# Altium PCB 16CH.PcbDoc (part 2 of 2)
Units mm, origin at the board's own origin, x right, y up, seen from the top; angles counter-clockwise.
Board outline 152.4 x 101.6 mm, 2 copper layers (F.Cu, B.Cu); 147 components, 0 nets, 455 pads, 153 vias.
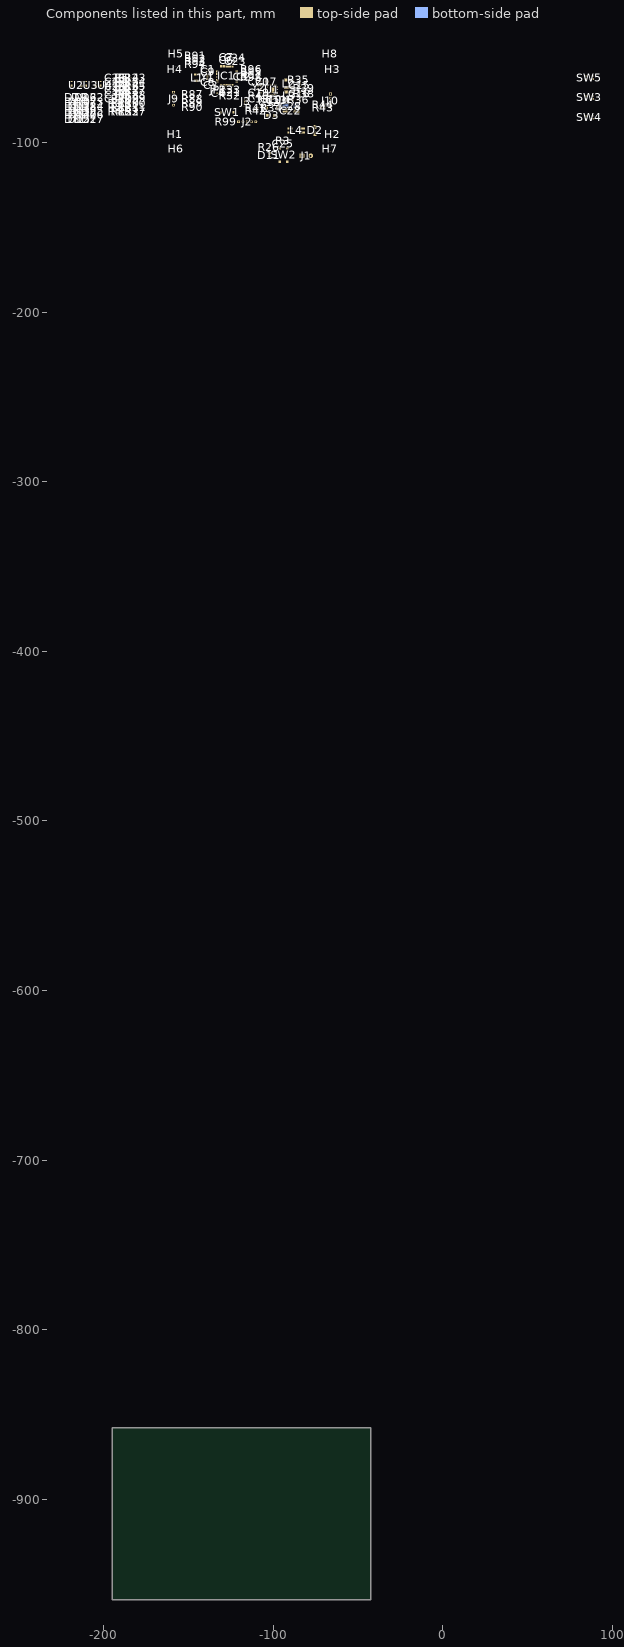
[diagram p2: the components of this part, seen from the top]

## Part data
C1 C2 C3 C4 C5 C6 C7 C10 C11 C12 C13 C14 C17 C18 C21 C23 C24 C25: library part C_0603_1608Metric, "Capacitor SMD 0603 (1608 Metric), square (rectangular) end terminal, IPC-7351 nominal, (Body size source: IPC-SM-782 page 76, https://www.pcb-3d.com/wordpress/wp-content/uploads/ipc-sm-782a_amendment_1_and_2.pdf), generated with kicad-footprint-generator", Package=C_0603, ki_fp_filters=C_*
  C1: Description="CAP CER 4.7uF 6.3V X7R 0603", MP=CL10B475KQ8NQNC, MF="Samsung Electro-Mechanics", OZD=C1608X7S1A475K080AC
  C2 C14: Description="CAP CER 1uF 10V X7R 0603", MP=CL10B105KP8NNNC, MF="Samsung Electro-Mechanics", OZD=CL10B105KP8NNNC
  C3 C4 C5 C6 C21: Description="CAP CER 100nF 50V X7R 0603", MP=CC0603KRX7R9BB104, MF=YAGEO
  C7: Description="CAP CER 2.2uF 10V X7R 0603", MP=CL10B225KP8NNNC, MF="Samsung Electro-Mechanics", OZD=CL10B225KP8NNNC
  C10: Description="MLCC (1608) 0603 47nF 50VDC ±10% X7R", MP=CL10B473KB8NNNC, MF=SAMSUNG, OZD=CL10B473KB8NNNC
  C11: Description="CAP CER 220nF 50V X7R 0603", MP=CL10B224KB8NNNC, MF="Samsung Electro-Mechanics", OZD=CL10B224KB8NNNC
  C12 C13 C17 C18 C23 C24: Description="CAP CER 100nF 50V X7R 0603", MP=CL10B104KB8NNNC, MF="Samsung Electro-Mechanics"
  C25: Description="X7R 100nF 50V ±10% 0603 Multilayer Ceramic", MP=CC0603KRX7R9BB104, MF=YAGEO
C8 C9 C19 C20: library part C_0603_1608Metric, "Capacitor SMD 0603 (1608 Metric), square (rectangular) end terminal, IPC-7351 nominal, (Body size source: IPC-SM-782 page 76, https://www.pcb-3d.com/wordpress/wp-content/uploads/ipc-sm-782a_amendment_1_and_2.pdf), generated with kicad-footprint-generator", Package=C0603, MF="Samsung Electro-Mechanics", ki_fp_filters=C_*
  C8 C9: Datasheet=https://www.lcsc.com/datasheet/lcsc_datasheet_2304140030_YAGEO-CC0603JRNPO9BN200_C105621.pdf, Description="CAP CER 15pF 50V C0G 0603", MP=CL10C150JB8NNNC, OZD=CL10C150JB8NNNC
  C19 C20: Description="CAP CER 10pF 50V C0G 0603", MP=CL10C100JB8NNNC, OZD=CL10C100JB8NNNC
C15 C16: library part C_0805_2012Metric, "Capacitor SMD 0805 (2012 Metric), square (rectangular) end terminal, IPC-7351 nominal, (Body size source: IPC-SM-782 page 76, https://www.pcb-3d.com/wordpress/wp-content/uploads/ipc-sm-782a_amendment_1_and_2.pdf, https://docs.google.com/spreadsheets/d/1BsfQQcO9C6DZCsRaXUlFlo91Tg2WpOkGARC1WS5S8t0/edit?usp=sharing), generated with kicad-footprint-generator", Package=C_0805, Description="CAP CER 10uF 16V X7R 0805", MP=CL21B106KOQNNNE, MF="Samsung Electro-Mechanics", OZD=CL21B106KOQNNNE, ki_fp_filters=C_*
C22: library part CP_Elec_8x10, "SMD capacitor, aluminum electrolytic, Nichicon, 8.0x10mm", Package="Radial D8 L10", Description="CAP.EL.100uF 35V 8x10 105C 3000H AEC-Q200 SMT", MP=CD035M101F10PKKKV00A, MF=SUSCON, ki_fp_filters=C_*
C26 C27 C29 C30 C31 C32: library part C_0603_1608Metric, "Capacitor SMD 0603 (1608 Metric), square (rectangular) end terminal, IPC-7351 nominal, (Body size source: IPC-SM-782 page 76, https://www.pcb-3d.com/wordpress/wp-content/uploads/ipc-sm-782a_amendment_1_and_2.pdf)", Package=C_0603, Datasheet=~, Description="CAP CER 100nF 50V X7R 0603", KiLib_Generator=SMD_2terminal_chip_molded, MP=CC0603KRX7R9BB104, MF=YAGEO, ki_fp_filters=C_*
C28: library part CP_Elec_8x10, "SMD capacitor, aluminum electrolytic, Nichicon, 8.0x10mm", Description="capacitor, US symbol", OZD=EEEFK1C471P, ki_fp_filters=C_*
D1 D4 D5 D6 D7 D8 D9 D10 D12 D13 D14 D15 D16 D17 D18 D19 D20 D21 D22 D23 D24 D25 D26 D27: library part LED_0603_1608Metric, "LED SMD 0603 (1608 Metric), square (rectangular) end terminal, IPC-7351 nominal, (Body size source: http://www.tortai-tech.com/upload/download/2011102023233369053.pdf)", Package=L_0603, Description="LED SMD 0603 ORANGE 112mcd 130° WATER CLEAR", KiLib_Generator=SMD_2terminal_chip_molded, Sim.Pins="1=K 2=A", MF=LITEON, MP=LTST-C190KFKT-5A, ki_fp_filters="LED* LED_SMD:* LED_THT:*"
D2 D3: library part D_SMA, "Diode SMA (DO-214AC)", Package="DO214AC (SMA)", MF=HOTTECH
  D2: Description="DIODE TVS 400W 40V DO214AC SMA", MP=SMAJ40CA-HT, OZD=SMAJ40CA-HT, ki_fp_filters="TO-???* *_Diode_* *SingleDiode* D_*"
  D3: Datasheet=https://www.wontop.com/uploadfiles/56/sort_excel/pdf/ss22.pdf, Description="DIODE SCHOTTKY 1A 80V DO214AC (SMA)", MP=SS18-HT, OZD=SS18-HT, ki_fp_filters=D*SMA*
D11: library part LED_D3.0mm, "LED, diameter 3.0mm, 2 pins, generated by kicad-footprint-generator", Package="Through Hole,D=3mm", Description="20mA 2.5V Green 3mm Round Lens 60mW", MP=TZ-L2-03YYBYG1GDJ30-001, MF=TUOZHAN, OZD=FYL-5014UBC1C-1MA-TR13, ki_fp_filters="LED* LED_SMD:* LED_THT:*"
H1 H2 H3 H4 H5 H6 H7 H8: library part MountingHole_3mm, "Mounting Hole 3mm, no annular", Description="Mounting Hole without connection", ki_fp_filters=MountingHole*
IC1: library part LQFP-64_10x10mm_P0.5mm, "LQFP, 64 Pin (https://www.analog.com/media/en/technical-documentation/data-sheets/ad7606_7606-6_7606-4.pdf), generated with kicad-footprint-generator ipc_gullwing_generator.py", Package=LFQFP-64(10x10), Datasheet=https://www.renesas.com/us/ja/document/man/re01-group-products-256-kb-flash-memory-users-manual-hardware?language=ja&r=1321781, Description="ARM Cortex-M23 32 Bit 48MHz 53 LFQFP-64(10x10) Microcontrollers RoHS", MP=R7FA2L1AB3CFM, MF=RENESAS
J1: library part Samtec_HPM-02-01-x-S_Straight_1x02_Pitch5.08mm, "Through hole straight Samtec HPM power header series 11.94mm post length, 1x02, 5.08mm pitch, single row", Package="THT V/T", Description="CONNECTOR PC PIN CIRC .041DIA 12.56MM TIN", MP=L-KLS8-2170-13, MF="KLS ELECTRONIC", OZD=L-KLS8-2170-13, ki_fp_filters=TerminalBlock*:*
J2: library part PinHeader_1x05_P2.54mm_Vertical, "Through hole straight pin header, 1x05, 2.54mm pitch, single row", Description="Generic connector, single row, 01x05, script generated (kicad-library-utils/schlib/autogen/connector/)", ki_fp_filters=Connector*:*_1x??_*
J3: library part Tag-Connect_TC2030-IDC-NL_2x03_P1.27mm_Vertical, "Tag-Connect programming header; http://www.tag-connect.com/Materials/TC2030-IDC-NL.pdf", Datasheet=https://www.tag-connect.com/wp-content/uploads/bsk-pdf-manager/TC2030-CTX_1.pdf, Description="Tag-Connect ARM Cortex SWD JTAG connector, 6 pin, no legs", ki_fp_filters=*TC2030*
J9 J10: library part PinHeader_1x04_P2.54mm_Vertical, "Through hole straight pin header, 1x04, 2.54mm pitch, single row", Description="Generic connector, single row, 01x04, script generated (kicad-library-utils/schlib/autogen/connector/)", ki_fp_filters=Connector*:*_1x??_*
JP1: library part SolderJumper-2_P1.3mm_Open_TrianglePad1.0x1.5mm, "SMD Solder Jumper, 1x1.5mm Triangular Pads, 0.3mm gap, open", Description="Solder Jumper, 2-pole, open", ki_fp_filters=SolderJumper*Open*
L1: library part L_APV_ANR5012, "Inductor, APV, ANR5012, 5.0x5.0x1.2mm, (http://en.apvind.com/public/upload/20240407/3375c395e460caa8519b4d637d9113ce.pdf), generated with kicad-footprint-generator gen_inductor.py", Package="Non Standard", Description="INDUCTOR FIXED 0302 4.7uH SMD", OZD=PCD0302MT4R7, Field6=NRS5030T4R7MMGJV, MF=VIKING, MP=PCD0302MT4R7, ki_fp_filters="Choke_* *Coil* Inductor_* L_*"
L2 L3: library part L_APV_ANR6028, "Inductor, APV, ANR6028, 6.0x6.0x2.8mm, (http://en.apvind.com/public/upload/20240407/3375c395e460caa8519b4d637d9113ce.pdf), generated with kicad-footprint-generator gen_inductor.py", Package="Non Standard", Description="INDUCTOR POWER 220UH 6X6MM 500mA SMD", MP=NR6028-221M, MF="CORE MASTER", ki_fp_filters="Choke_* *Coil* Inductor_* L_*"
L4: library part L_CommonMode_50474C_7.5x5.9mm, "WE-CNSW SMT Common Mode Line Filter, https://www.we-online.com/components/products/datasheet/744232090.pdf", Package=SMD-4P,7x5.9mm, Datasheet=https://www.we-online.com/components/products/datasheet/744232090.pdf, Description="CMC 470uH 700mA 2LN SMD", MP=50474C, MF=muRata, OZD=50474C, ki_fp_filters=L*CommonMode*Wurth*WE*CNSW*1206*
R1 R2 R4 R5 R6 R7 R8 R9 R10 R11 R12 R13 R14 R15 R16 R17 R18 R19 R20 R21 R22 R23 R24 R25 R27 R28 R29 R30 R31 R37: library part R_0603_1608Metric, "Resistor SMD 0603 (1608 Metric), square (rectangular) end terminal, IPC-7351 nominal, (Body size source: IPC-SM-782 page 72, https://www.pcb-3d.com/wordpress/wp-content/uploads/ipc-sm-782a_amendment_1_and_2.pdf)", Package=R_0603, KiLib_Generator=SMD_2terminal_chip_molded, ki_fp_filters=R_*
  R1 R6 R7: Description="100mW Thick Film Resistors 75V Â±100ppm/â„ƒ Â±5% 10kÎ© 0603", MF=FOJAN, MP=FRC0603J103TS
  R2 R4 R5: Description="RES 330Ω ±5% 100mW 0603", MF=FOJAN, MP="FRC0603J331 TS"
  R8 R9 R10 R11 R12 R13 R14 R15 R16 R17 R18 R19 R20 R21 R22 R23 R24 R25 R27 R28 R29 R30 R31 R37: Description="RES 1kΩ ±5% 100mW 0603", MF=YAGEO, MP=RC0603JR-071KL
R3 R32 R33 R38 R39 R40 R41 R42 R43 R44 R87 R88 R89 R90 R91 R92 R93 R94 R95 R96 R97 R98 R99: library part R_0603_1608Metric, "Resistor SMD 0603 (1608 Metric), square (rectangular) end terminal, IPC-7351 nominal, (Body size source: IPC-SM-782 page 72, https://www.pcb-3d.com/wordpress/wp-content/uploads/ipc-sm-782a_amendment_1_and_2.pdf), generated with kicad-footprint-generator", Package=R_0603, ki_fp_filters=R_*
  R3 R32 R33: Description="RES 10kΩ ±5% 100mW 0603", MP=FRC0603J103TS, MF=FOJAN
  R38: Description="RES.(1608) 0603 91K Ohms 1% 1/10W-S 100PPM", MP=0603SAF9102T5E, MF=ROYALOHM, OZD=0603SAF9102T5E
  R39: Description="RES.(1608) 0603 10K Ohms 1% 1/4W AUTOMOTIV", MP=PS03W4F1002T5E, MF=ROYALOHM, OZD=PS03W4F1002T5E
  R40: Description="RES.(1608) 0603 20K Ohms 1% 1/10W-S 100PPM", MP=0603SAF2002T5E, MF=ROYALOHM, OZD=0603SAF2002T5E
  R41: Description="RES 220kΩ ±1% 100mW 0603", MP=ERJ3EKF2203V, MF=PANASONIC
  R42 R44: Description="RES 27kΩ ±1% 100mW 0603", MP=ERJ3EKF2702V, MF=PANASONIC
  R43: Description="RES 100kΩ ±1% 100mW 0603", MP=RC0603FR-07100KL, MF=YAGEO
  R91 R92 R93 R94: Description="RES 33Ω ±5% 100mW 0603", MP=RC0603JR-0733RL, MF=YAGEO
  R95 R96 R97 R98: Description="RES.(1608) 0603 33 Ohms 1% 1/10W-S 200PPM", MP=0603SAF330JT5E, MF=ROYALOHM, OZD=0603SAF330JT5E
  R99: Description="RES 330Ω ±5% 100mW 0603", MP="FRC0603J331 TS", MF=FOJAN
R26: library part R_0603_1608Metric, "Resistor SMD 0603 (1608 Metric), square (rectangular) end terminal, IPC-7351 nominal, (Body size source: IPC-SM-782 page 72, https://www.pcb-3d.com/wordpress/wp-content/uploads/ipc-sm-782a_amendment_1_and_2.pdf), generated with kicad-footprint-generator", Package=R0603, Description="RES 1kΩ ±5% 100mW 0603", MP=SCR0603J1K, MF=VO, ki_fp_filters=R_*
R34: library part R_2512_6332Metric, "Resistor SMD 2512 (6332 Metric), square (rectangular) end terminal, IPC-7351 nominal, (Body size source: IPC-SM-782 page 72, https://www.pcb-3d.com/wordpress/wp-content/uploads/ipc-sm-782a_amendment_1_and_2.pdf), generated with kicad-footprint-generator", Package=R_2512, Description="RES.(6432) 2512 27 Ohms 1% 2W", MP=HP122WF270JT4E, MF=ROYALOHM, OZD=HP122WF270JT4E, ki_fp_filters=R_*
R35 R36: library part R_0805_2012Metric, "Resistor SMD 0805 (2012 Metric), square (rectangular) end terminal, IPC-7351 nominal, (Body size source: IPC-SM-782 page 72, https://www.pcb-3d.com/wordpress/wp-content/uploads/ipc-sm-782a_amendment_1_and_2.pdf), generated with kicad-footprint-generator", Package=R_0805, Description="RES.(2012) 0805 1 Ohms 1%", MP=ERJ6RQF1R0V, MF=PANASONIC, OZD=ERJ6RQF1R0V, ki_fp_filters=R_*
REF**: library part LayerMarker_4_6.35x2.54mm_TextH1mm_P1.27mm_Named_BottomMirrored, "Layer marker, 4 layers, layer names, text size 1mm, pitch 1.27mm, margin 1.27mm"
SW1: library part SW_SPST_CK_RS282G05A3, "https://www.mouser.com/ds/2/60/RS-282G05A-SM_RT-1159762.pdf"
SW2: library part SW_SPST_Omron_B3FS-100xP, "Surface Mount Tactile Switch for High-Density Mounting, 3.1mm height, https://omronfs.omron.com/en_US/ecb/products/pdf/en-b3fs.pdf", Package=SMD,12x12mm, Description="Height 8mm SMD,12x12mm Tactile Switches RoHS", MP=KH-12X12X8H-SMT, MF=kinghelm
SW3 SW4 SW5: library part L-KLS7-TS3402-2.5, "Tactile switch, 4.7 x 3.5 mm, short push travel, H2.5mm, https://industry.panasonic.com/ac/cdn/e/control/switch/light-touch/catalog/sw_lt_eng_4735s.pdf", Package="SMT V/T", Description="SWITCH TACT 3.00x4.00 2.50mm 160gF SMT V/T", MP=L-KLS7-TS3402-2.5-160-T, MF="KLS ELECTRONIC", ki_fp_filters=SW*MEC*5G*
U1: library part QFN40_485AU-01_ONS, Package=QFN-40-EP(6x6), Datasheet=NCN5130MNTWG, Description="3.13V~3.47V 4mA QFN-40-EP(6x6) Drivers, Receivers, Transceivers RoHS", MP=NCN5130MNTWG, MF=onsemi, ki_fp_filters="QFN40_485AU-01_ONS QFN40_485AU-01_ONS-M QFN40_485AU-01_ONS-L"
U2 U3 U4: library part TSSOP-16_4.4x5mm_P0.65mm, "TSSOP, 16 Pin (https://www.jedec.org/document_search?search_api_views_fulltext=MO-153)", Package=TSSOP-16, Datasheet=http://www.ti.com/lit/ds/symlink/sn74hc595.pdf, Description="8-bit serial-in, serial or parallel-out shift register with output latches; 3-state", KiLib_Generator=package/gullwing, MP=74HC595PW,118, MF=Nexperia, ki_fp_filters="DIP*W7.62mm* SOIC*3.9x9.9mm*P1.27mm* TSSOP*4.4x5mm*P0.65mm* SOIC*5.3x10.2mm*P1.27mm* SOIC*7.5x10.3mm*P1.27mm*"
Y1: library part Crystal_SMD_SeikoEpson_FA238-4Pin_3.2x2.5mm, "crystal Epson Toyocom FA-238 https://support.epson.biz/td/api/doc_check.php?dl=brief_fa-238v_en.pdf, 3.2x2.5mm^2 package", Package="4-SMD 3225", Description="CRYSTAL 20MHz 3.2X2.5 4PIN 10pF SMD RALTRON", MP=FL3P2X2P5SSC, MF=RALTRON, OLD_MP=RH100-20.000-22-TR, OZD=RH100-20.000-10-1010-TR, ki_fp_filters=Crystal*
Y2: library part Crystal_SMD_SeikoEpson_FA238V-4Pin_3.2x2.5mm, "crystal Epson Toyocom FA-238 series https://support.epson.biz/td/api/doc_check.php?dl=brief_fa-238v_en.pdf, 3.2x2.5mm^2 package", Package=4-SMD, Description="CRYSTAL 16MHz 10pF SMD", MP=RH100-16.000-10-1010-EXT, MF=RALTRON, OZD=RH100-16.000-10-1010-EXT, ki_fp_filters=Crystal*

## Via types
v1: diameter 0.6, hole 0.35, F.Cu to B.Cu, tented both sides, 121 vias
v2: diameter 0.5, hole 0.3, F.Cu to B.Cu, tented both sides, 28 vias
v3: diameter 0.8, hole 0.4, F.Cu to B.Cu, tented both sides, 3 vias
v4: diameter 0.8, hole 0.45, F.Cu to B.Cu, tented both sides, 1 vias

## Nets (pads, with @x,y where several pads share a name; then routed paths per layer and width w, separated by ;. In a path a pad name is that pad's centre, name@x,y a point inside that pad or via, vN(x,y) a via of type N, cw(c..) or ccw(c..) an arc to the next point about the centre after c; other vN are vias at no path point)
pads on no net: C1.1 C1.2 C2.1 C2.2 C3.1 C3.2 C4.1 C4.2 C5.1 C5.2 C6.1 C6.2 C7.1 C7.2 C8.1 C8.2 C9.1 C9.2 C10.1 C10.2 C11.1 C11.2 C12.1 C12.2 C13.1 C13.2 C14.1 C14.2 C15.1 C15.2 C16.1 C16.2 C17.1 C17.2 C18.1 C18.2 C19.1 C19.2 C20.1 C20.2 C21.1 C21.2 C22.1 C22.2 C23.1 C23.2 C24.1 C24.2 C25.1 C25.2 C26.1 C26.2 C27.1 C27.2 C28.1 C28.2 C29.1 C29.2 C30.1 C30.2 C31.1 C31.2 C32.1 C32.2 D1.1 D1.2 D2.1 D2.2 D3.1 D3.2 D4.1 D4.2 D5.1 D5.2 D6.1 D6.2 D7.1 D7.2 D8.1 D8.2 D9.1 D9.2 D10.1 D10.2 D11.1 D11.2 D12.1 D12.2 D13.1 D13.2 D14.1 D14.2 D15.1 D15.2 D16.1 D16.2 D17.1 D17.2 D18.1 D18.2 D19.1 D19.2 D20.1 D20.2 D21.1 D21.2 D22.1 D22.2 D23.1 D23.2 D24.1 D24.2 D25.1 D25.2 D26.1 D26.2 D27.1 D27.2 H1.Un1 H2.Un1 H3.Un1 H4.Un1 H5.Un1 H6.Un1 H7.Un1 H8.Un1 IC1.1 IC1.2 IC1.3 IC1.4 IC1.5 IC1.6 IC1.7 IC1.8 IC1.9 IC1.10 IC1.11 IC1.12 IC1.13 IC1.14 IC1.15 IC1.16 IC1.17 IC1.18 IC1.19 IC1.20 IC1.21 IC1.22 IC1.23 IC1.24 IC1.25 IC1.26 IC1.27 IC1.28 IC1.29 IC1.30 IC1.31 IC1.32 IC1.33 IC1.34 IC1.35 IC1.36 IC1.37 IC1.38 IC1.39 IC1.40 IC1.41 IC1.42 IC1.43 IC1.44 IC1.45 IC1.46 IC1.47 IC1.48 IC1.49 IC1.50 IC1.51 IC1.52 IC1.53 IC1.54 IC1.55 IC1.56 IC1.57 IC1.58 IC1.59 IC1.60 IC1.61 IC1.62 IC1.63 IC1.64 J1.1 J1.2 J2.1 J2.2 J2.3 J2.4 J2.5 J3.1 J3.2 J3.3 J3.4 J3.5 J3.6 J3.Un1 J3.Un2 J3.Un3 J9.1 J9.2 J9.3 J9.4 J10.1 J10.2 J10.3 J10.4 JP1.1 JP1.2 L1.1 L1.2 L2.1 L2.2 L3.1 L3.2 L4.1 L4.2 L4.3 L4.4 R1.1 R1.2 R2.1 R2.2 R3.1 R3.2 R4.1 R4.2 R5.1 R5.2 R6.1 R6.2 R7.1 R7.2 R8.1 R8.2 R9.1 R9.2 R10.1 R10.2 R11.1 R11.2 R12.1 R12.2 R13.1 R13.2 R14.1 R14.2 R15.1 R15.2 R16.1 R16.2 R17.1 R17.2 R18.1 R18.2 R19.1 R19.2 R20.1 R20.2 R21.1 R21.2 R22.1 R22.2 R23.1 R23.2 R24.1 R24.2 R25.1 R25.2 R26.1 R26.2 R27.1 R27.2 R28.1 R28.2 R29.1 R29.2 R30.1 R30.2 R31.1 R31.2 R32.1 R32.2 R33.1 R33.2 R34.1 R34.2 R35.1 R35.2 R36.1 R36.2 R37.1 R37.2 R38.1 R38.2 R39.1 R39.2 R40.1 R40.2 R41.1 R41.2 R42.1 R42.2 R43.1 R43.2 R44.1 R44.2 R87.1 R87.2 R88.1 R88.2 R89.1 R89.2 R90.1 R90.2 R91.1 R91.2 R92.1 R92.2 R93.1 R93.2 R94.1 R94.2 R95.1 R95.2 R96.1 R96.2 R97.1 R97.2 R98.1 R98.2 R99.1 R99.2 SW1.1 SW1.2 SW2.1 SW2.2 SW3.1 SW3.2 SW3.3 SW3.4 SW4.1 SW4.2 SW4.3 SW4.4 SW5.1 SW5.2 SW5.3 SW5.4 U1.1 U1.2 U1.3 U1.4 U1.5 U1.6 U1.7 U1.8 U1.9 U1.10 U1.11 U1.12 U1.13 U1.14 U1.15 U1.16 U1.17 U1.18 U1.19 U1.20 U1.21 U1.22 U1.23 U1.24 U1.25 U1.26 U1.27 U1.28 U1.29 U1.30 U1.31 U1.32 U1.33 U1.34 U1.35 U1.36 U1.37 U1.38 U1.39 U1.40 U1.41 U2.1 U2.2 U2.3 U2.4 U2.5 U2.6 U2.7 U2.8 U2.9 U2.10 U2.11 U2.12 U2.13 U2.14 U2.15 U2.16 U3.1 U3.2 U3.3 U3.4 U3.5 U3.6 U3.7 U3.8 U3.9 U3.10 U3.11 U3.12 U3.13 U3.14 U3.15 U3.16 U4.1 U4.2 U4.3 U4.4 U4.5 U4.6 U4.7 U4.8 U4.9 U4.10 U4.11 U4.12 U4.13 U4.14 U4.15 U4.16 Y1.1 Y1.2 Y1.3 Y1.4 Y2.1 Y2.2 Y2.3 Y2.4
copper on no net: | length 1749.5
  F.Cu w0.2: -126.238,-72.072 -126.238,-72.412 -123.068,-75.582 -116.873,-75.582 ; -123.468,-66.257 -123.468,-67.447 -123.203,-67.712 v2(-123.103,-67.712) ; -121.543,-64.332 -117.183,-64.332 -114.928,-66.587 ; -115.603,-75.582 -114.273,-75.582 ; -115.603,-74.312 -114.803,-73.512 -114.803,-66.712 -114.928,-66.587 ; -115.283,-87.712 -115.283,-81.192 -114.273,-80.182 -114.273,-75.582 ; v2(-113.603,-67.712) -113.503,-67.812 -113.503,-74.812 -114.273,-75.582 ; -112.743,-87.712 -112.743,-67.122 -113.303,-66.562 -114.903,-66.562 -114.928,-66.587 ; v1(-104.003,-73.212) -103.003,-73.212 -102.453,-72.662 -102.213,-72.422 -102.213,-71.867 -102.213,-70.722 v1(-101.553,-70.062) v1(-100.463,-68.972) -99.713,-69.722 v1(-99.303,-69.722) -97.567,-69.722 -95.493,-69.722 v1(-95.053,-70.162)
  F.Cu w0.25: v1(-162.003,-53.712) -146.428,-53.712 ; v1(-161.253,-52.762) -147.653,-52.762 -146.97,-52.078 -146.428,-52.078 ; v1(-160.453,-51.362) -160.403,-51.412 -147.903,-51.412 -146.936,-50.445 -146.428,-50.445 ; v1(-159.303,-50.412) -148.028,-50.412 -146.428,-48.812 ; v2(-155.103,-55.212) -154.997,-55.318 -136.103,-55.318 -134.089,-57.332 -132.893,-57.332 ; v2(-155.003,-56.112) -154.803,-55.912 -136.403,-55.912 -134.483,-57.832 -132.893,-57.832 ; v2(-154.003,-54.712) -135.803,-54.712 -133.683,-56.832 -132.893,-56.832 ; -151.478,-79.202 -151.468,-79.192 -148.228,-79.192 ; -151.478,-76.662 -151.468,-76.652 -148.228,-76.652 ; -151.478,-74.122 -151.468,-74.112 -148.228,-74.112 ; -151.478,-71.582 -151.468,-71.572 -148.228,-71.572 ; -146.578,-79.192 -146.578,-78.587 -145.503,-77.512 v2(-130.203,-77.512) ; -146.578,-76.652 -136.203,-76.652 -129.343,-76.652 v2(-129.303,-76.612) ; -146.578,-74.112 -146.553,-74.112 -145.203,-75.462 v2(-128.303,-75.462) ; -146.578,-71.572 -146.543,-71.572 -143.603,-74.512 -129.203,-74.512 -127.697,-73.006 -127.697,-67.303 -127.968,-67.032 -127.968,-66.257 ; -144.778,-53.712 -132.163,-53.712 -130.968,-54.907 ; -144.778,-52.062 -132.353,-52.062 -130.468,-53.947 -130.468,-54.907 ; -144.778,-50.445 -133.12,-50.445 -129.468,-54.097 -129.468,-54.907 ; -144.778,-48.812 -143.778,-49.812 -133.003,-49.812 -128.968,-53.847 -128.968,-54.907 ; -139.123,-60.192 -139.123,-59.967 -137.468,-58.312 -137.303,-58.312 -134.783,-60.832 -132.893,-60.832 ; -137.548,-64.402 -137.548,-62.482 -137.523,-62.457 -136.648,-62.457 -135.523,-61.332 -132.893,-61.332 ; -132.893,-58.332 -131.623,-58.332 v2(-131.603,-58.312) ; v2(-131.603,-87.762) -131.553,-87.712 -128.528,-87.712 ; v2(-130.703,-101.862) -130.678,-101.887 -102.203,-101.887 ; v2(-130.003,-56.112) -130.003,-54.942 -129.968,-54.907 ; v2(-129.703,-70.012) -129.703,-68.512 -129.468,-68.277 -129.468,-66.257 ; v2(-129.003,-69.212) -129.003,-66.292 -128.968,-66.257 ; -128.468,-66.257 -128.468,-67.547 v2(-128.303,-67.712) ; -126.968,-66.257 -126.968,-69.622 -126.178,-70.412 -126.238,-70.472 -126.238,-72.072 -126.238,-74.877 -123.203,-77.912 v1(-123.203,-80.362) -123.203,-82.212 ; -126.878,-87.712 -123.478,-91.112 -106.803,-91.112 -99.003,-98.912 -94.803,-98.912 -94.803,-100.787 -94.778,-100.812 -96.103,-102.137 -96.103,-103.312 -96.103,-111.312 ; -126.468,-66.257 -126.468,-68.572 -126.228,-68.812 ; -121.543,-63.832 -115.083,-63.832 v2(-114.903,-64.012) ; -121.543,-63.332 -114.323,-63.332 -113.403,-62.412 -113.403,-61.612 ; -121.543,-59.332 -118.823,-59.332 -117.803,-58.312 -113.403,-58.312 ; -121.543,-58.832 -119.323,-58.832 -117.203,-56.712 -113.403,-56.712 ; v2(-114.903,-60.112) -114.733,-59.942 -113.403,-59.942 ; -111.753,-61.612 -111.453,-61.612 -110.453,-60.612 -102.753,-60.612 -101.713,-61.652 -101.713,-66.076 ; -111.753,-59.942 -102.573,-59.942 -101.213,-61.302 -101.213,-66.076 ; -111.753,-58.312 v2(-105.303,-58.312) ; -111.753,-56.712 v2(-106.003,-56.712) ; -109.003,-66.162 -109.003,-65.927 -107.278,-64.202 -106.513,-64.202 -105.503,-65.212 -105.503,-67.562 -104.843,-68.222 -103.359,-68.222 ; -107.278,-74.162 -106.653,-74.162 v1(-106.053,-73.562) -103.713,-71.222 -103.359,-71.222 ; -107.228,-72.452 -106.143,-72.452 -103.913,-70.222 -103.359,-70.222 ; -107.103,-68.562 -107.103,-70.367 -107.278,-70.542 -106.633,-70.542 -104.813,-68.722 -103.359,-68.722 ; v2(-105.503,-70.612) -104.946,-70.612 -104.056,-69.722 -103.359,-69.722 ; v2(-105.003,-69.812) -104.413,-69.222 -103.359,-69.222 ; v1(-104.353,-65.412) -104.603,-65.662 -104.603,-66.362 ; v1(-104.353,-62.562) -104.353,-61.862 -104.003,-61.512 -103.103,-61.512 -102.213,-62.402 -102.213,-66.076 -102.213,-67.222 v1(-101.638,-67.797) ; -103.359,-66.722 -104.243,-66.722 -104.603,-66.362 ; -102.203,-106.142 -102.203,-103.537 ; -101.318,-76.322 -100.853,-75.857 -100.853,-73.612 -100.703,-73.462 -100.713,-73.452 -100.713,-71.867 ; -99.713,-71.867 -99.713,-73.402 -97.893,-75.222 -97.893,-75.547 ; -97.567,-71.222 -96.693,-71.222 v1(-96.103,-71.812) ; -97.567,-67.722 -99.213,-67.722 v1(-99.428,-67.937) v1(-100.463,-68.972) v1(-101.638,-67.797) ; -81.713,-70.437 v1(-81.713,-69.512) -81.713,-68.697 ; -104.603,-66.362 -104.603,-67.412 -104.293,-67.722 -103.359,-67.722 -101.713,-67.722 v1(-101.638,-67.797)
  F.Cu w0.3: -144.623,-63.572 -143.483,-64.712 v1(-141.653,-64.712) ; -144.623,-59.872 -141.863,-59.872 v1(-141.853,-59.862) ; -137.428,-56.812 -136.503,-56.812 v1(-135.653,-57.662) -134.483,-58.832 -132.893,-58.832 ; v1(-134.803,-59.712) -134.183,-60.332 -132.893,-60.332 -129.783,-60.332 v1(-129.503,-60.612) ; v1(-134.603,-65.012) -130.653,-65.012 -130.468,-65.197 -130.468,-66.257 ; v1(-133.253,-72.562) -132.813,-72.122 -132.813,-70.992 -132.728,-70.907 -132.728,-68.812 ; v1(-133.253,-66.262) -133.303,-66.212 -135.678,-66.212 -135.678,-62.987 -134.523,-61.832 -132.893,-61.832 ; v1(-133.253,-48.962) -133.003,-48.962 -128.468,-53.497 -128.468,-54.907 ; v4(-133.253,-46.512) -127.703,-46.512 -126.618,-47.597 -126.618,-49.792 -126.638,-49.812 -126.638,-51.492 -126.968,-51.822 -126.968,-54.907 ; -131.278,-68.812 -130.983,-68.517 -130.983,-68.492 -129.968,-67.477 -129.968,-66.257 ; -128.188,-51.492 -128.188,-52.077 ; -127.968,-56.347 -127.968,-54.907 -127.968,-52.297 -128.188,-52.077 ; -127.503,-56.212 -127.468,-56.177 -127.468,-54.907 -127.468,-52.797 -128.188,-52.077 ; v1(-124.953,-58.862) -122.983,-60.832 -121.543,-60.832 -119.458,-60.832 -118.963,-60.337 -117.153,-60.337 -117.123,-60.367 -117.123,-59.332 v1(-116.953,-59.162) ; -124.588,-72.412 -124.503,-72.412 -122.603,-74.312 -116.873,-74.312 -117.653,-73.532 -117.653,-69.612 -117.653,-69.162 ; -124.578,-68.812 -118.003,-68.812 -117.653,-69.162 ; -123.968,-54.907 -123.968,-50.722 -123.238,-49.992 -123.238,-48.947 -122.903,-48.612 -85.703,-48.612 -76.553,-57.762 v2(-76.553,-67.562) ; -123.468,-54.907 -123.468,-52.772 -122.878,-52.182 -122.878,-52.437 -121.803,-53.512 v2(-110.703,-53.512) ; -121.543,-61.332 -119.518,-61.332 -118.963,-61.887 -117.153,-61.887 -117.123,-61.917 -115.858,-61.917 v1(-115.803,-61.862) ; v1(-115.703,-66.962) -115.703,-67.212 -117.653,-69.162 ; -110.728,-81.312 -110.728,-79.612 -110.728,-78.037 v2(-110.703,-78.012) ; -109.078,-79.612 v2(-107.403,-79.612) ; -103.546,-79.412 -104.903,-79.412 -105.403,-78.912 -105.403,-76.312 -101.713,-72.622 -101.713,-71.867 ; v1(-103.153,-62.712) -103.008,-62.857 -103.008,-64.002 -103.008,-64.407 -102.713,-64.702 -102.713,-66.076 ; -101.628,-74.552 -101.628,-73.737 -101.213,-73.322 -101.213,-71.867 ; -100.713,-66.076 -100.713,-64.322 v1(-100.303,-63.912) ; -100.213,-71.867 -100.213,-74.417 -100.078,-74.552 -100.078,-75.937 -97.621,-78.394 -97.621,-79.192 -97.841,-79.412 ; -99.213,-71.867 -99.213,-73.102 -98.318,-73.997 -97.893,-73.997 ; -98.713,-71.867 -98.713,-72.502 -98.203,-73.012 -98.153,-73.062 v1(-97.053,-73.062) ; -98.213,-71.867 -97.047,-71.867 -95.883,-73.032 -95.883,-73.997 ; -97.567,-69.222 -94.843,-69.222 -93.893,-70.172 -90.643,-70.172 ; -97.567,-68.722 -96.013,-68.722 v1(-95.853,-68.562) ; -97.567,-68.222 -96.441,-68.222 -95.731,-67.512 -90.683,-67.512 ; -97.567,-67.222 -96.313,-67.222 -95.753,-66.662 -95.553,-66.462 v1(-94.853,-66.462) ; v1(-95.803,-81.262) -92.853,-81.262 -92.833,-81.242 ; -93.228,-100.812 -93.228,-101.687 -91.603,-103.312 -91.603,-111.312 ; -71.328,-77.712 -71.308,-77.732 -71.308,-79.522 -71.308,-81.007 v2(-71.303,-81.012) ; -69.658,-79.522 -66.696,-79.522 -66.196,-79.022
  F.Cu w0.4: -97.567,-70.722 -95.693,-70.722 -93.203,-73.212 -91.303,-73.212 -90.643,-73.872 -90.643,-74.672 -86.105,-74.672 -85.965,-74.812 ; -97.567,-66.722 -97.013,-66.722 -95.603,-65.312 -92.983,-65.312 -90.683,-63.012 -90.483,-62.812 -85.816,-62.812
  F.Cu w0.6: -91.603,-103.312 -91.353,-103.062 v3(-89.703,-103.062)
  F.Cu w0.8: -102.503,-83.912 -102.503,-91.912 -100.306,-94.109 -90.073,-94.109 ; -98.503,-83.912 -97.903,-83.312 -97.903,-79.474 -97.841,-79.412
  F.Cu w1: -82.573,-94.109 -76.033,-94.109 -75.283,-94.859 -75.303,-94.879 v3(-75.303,-97.112) ; -82.573,-91.609 -76.033,-91.609 -75.283,-90.859 -75.23,-90.912 v3(-72.103,-90.912)
  B.Cu w0.2: v1(-123.203,-80.362) -123.103,-80.462 -111.253,-80.462 -110.203,-81.512 -110.203,-87.712 ; v2(-123.103,-67.712) v2(-113.603,-67.712)
  B.Cu w0.25: v1(-162.003,-53.712) -162.053,-53.762 -162.053,-64.312 -162.053,-76.662 -161.003,-77.712 -160.768,-77.947 -158.695,-77.947 ; v1(-161.253,-52.762) -161.253,-61.862 -161.253,-74.312 -160.158,-75.407 -158.695,-75.407 ; v1(-160.453,-51.362) -160.453,-72.662 -160.248,-72.867 -158.695,-72.867 ; v1(-159.303,-50.412) -159.353,-50.462 -159.353,-53.862 -159.853,-54.362 -159.853,-69.169 -158.695,-70.327 ; v2(-155.103,-55.212) -155.103,-55.306 -155.609,-55.812 -155.609,-57.718 -157.003,-59.112 -157.003,-76.217 -154.018,-79.202 ; v2(-155.003,-56.112) -155.003,-57.712 -156.403,-59.112 -156.403,-74.277 -154.018,-76.662 ; -154.018,-74.122 -155.093,-74.122 -155.103,-74.112 -155.903,-73.312 -155.903,-67.812 -155.903,-59.812 -155.003,-58.912 -154.003,-57.912 v2(-154.003,-54.712) ; v2(-131.603,-87.762) v2(-131.603,-58.312) ; v2(-130.703,-101.862) -130.703,-99.412 -130.697,-99.406 -130.697,-83.106 -131.003,-82.8 -131.003,-58.762 -130.003,-57.762 v2(-130.003,-56.112) ; v2(-130.203,-77.512) -130.203,-70.512 v2(-129.703,-70.012) ; v2(-129.303,-76.612) -129.003,-76.312 v2(-129.003,-69.212) ; v2(-128.303,-75.462) v2(-128.303,-67.712) ; v2(-114.903,-64.012) v2(-114.903,-60.112) v2@-114.803,-60.112 ; v1(-106.053,-73.562) -103.153,-70.662 v1(-103.153,-62.712) ; v2(-106.003,-56.712) -106.003,-58.312 -106.003,-70.112 v2(-105.503,-70.612) ; v2(-105.303,-58.312) -105.303,-69.512 v2(-105.003,-69.812) ; v1(-96.103,-71.812) -88.103,-71.812 -85.803,-69.512 v1(-81.713,-69.512)
  B.Cu w0.3: v1(-141.853,-59.862) -137.803,-59.862 -135.653,-57.712 v1(-135.653,-57.662) ; v1(-141.653,-64.712) -141.353,-65.012 v1(-134.603,-65.012) ; -116.253,-46.512 -115.803,-46.962 v1(-115.803,-61.862) -115.703,-61.962 v1(-115.703,-66.962) ; v2(-110.703,-78.012) v2(-110.703,-53.512) ; v2(-107.403,-79.612) -105.753,-81.262 v1(-95.803,-81.262) -95.803,-80.812 -97.078,-79.537 -97.078,-75.012 -97.078,-73.087 v1(-97.053,-73.062) -97.053,-69.762 v1(-95.853,-68.562) ; -103.853,-46.512 -103.153,-47.212 v1(-103.153,-62.712) ; v1(-94.853,-66.462) -87.103,-66.462 v1(-85.653,-65.012) ; v2(-76.553,-67.562) -76.553,-71.062 -71.303,-76.312 v2(-71.303,-81.012)
  B.Cu w0.4: -117.823,-87.712 -118.703,-88.592 -118.703,-101.962 -117.603,-103.062
  B.Cu w0.6: v4(-133.253,-46.512) -133.253,-71.412 -133.253,-101.412 -132.053,-102.612 -131.603,-103.062 -117.603,-103.062 v3(-89.703,-103.062)
  B.Cu w0.8: -154.018,-69.042 -154.018,-62.027 -152.403,-60.412 -152.403,-49.262 -149.653,-46.512 v4(-133.253,-46.512) -116.253,-46.512 -103.853,-46.512 -89.503,-46.512 -82.403,-53.612 v1(-82.403,-61.512)
  B.Cu w1: -82.948,-107.812 -82.948,-104.957 -77.703,-99.712 -75.303,-97.312 v3(-75.303,-97.112) ; v1(-82.553,-65.012) -76.603,-65.012 -73.803,-67.812 -73.803,-70.062 -69.923,-73.942 -66.196,-73.942 ; -77.868,-107.812 -75.003,-107.812 -74.503,-107.312 -72.103,-104.912 -72.103,-97.312 v3(-72.103,-90.912)
  other v1: -121.503,-97.662 -109.103,-96.562 -137.303,-96.212 -149.053,-95.612 -126.903,-93.862 -111.803,-92.512 -116.153,-92.362 -146.103,-91.162 -137.203,-90.812 -93.803,-89.762 -97.303,-89.412 -152.353,-86.662 -107.553,-85.712 -75.403,-84.162 -157.153,-84.062 -142.153,-83.562 -117.203,-83.462 -92.803,-83.362 -113.903,-81.662 -81.303,-81.662 -90.303,-81.262 -120.003,-78.762 -94.903,-78.612 -90.253,-78.412 -96.203,-77.012 -92.453,-76.562 -78.553,-74.962 -94.503,-74.762 -82.153,-74.562 -79.603,-73.962 -94.553,-73.512 -84.103,-73.412 -121.003,-73.212 -76.953,-72.862 -82.803,-72.162 -79.703,-72.162 -138.503,-71.712 -121.103,-71.662 -68.203,-71.512 -70.103,-71.362 -64.203,-71.362 -136.053,-70.562 -69.003,-70.062 -121.953,-69.962 -71.453,-69.712 -112.053,-69.662 -66.103,-69.362 -143.503,-69.212 -138.753,-67.812 -147.903,-67.212 -143.503,-66.612 -66.703,-64.662 -112.303,-63.962 -82.453,-63.862 -128.203,-63.512 -72.853,-63.512 -82.453,-62.912 -108.853,-62.712 -97.303,-62.262 -125.703,-62.062 -83.953,-61.362 -85.603,-61.312 -69.753,-59.912 -93.903,-59.312 -128.003,-59.012 -100.653,-56.412 -74.153,-55.512 -85.603,-54.512 -105.453,-52.012 -95.253,-51.812 -117.953,-50.862 -111.053,-50.662 -130.103,-49.462 -128.203,-48.462 -140.653,-48.312 -138.103,-48.262 -131.553,-47.962 -79.553,-47.412 -73.103,-47.012 -151.353,-45.462 -143.953,-44.712 -137.203,-44.612
  other v2: -104.103,-76.412 -103.203,-75.012

## Polygon pours and split planes (outlines as drawn)
no net on F.Cu "F.Cu--3" (solid, remove dead copper, pour order 9): -95.353,-77.41 -95.254,-77.187 -94.255,-76.289 -94.055,-76.212 -90.253,-76.212 -89.953,-76.512 -89.953,-83.562 -90.253,-83.862 -95.049,-83.862 -95.348,-83.557
no net on F.Cu "F.Cu--2" (solid, remove dead copper, pour order 7): -85.103,-71.612 -84.803,-71.312 -77.312,-71.312 -77.12,-71.242 -76.711,-70.902 -76.603,-70.671 -76.603,-69.012 -76.303,-68.712 -63.203,-68.712 -62.903,-69.012 -62.903,-72.612 -63.203,-72.912 -74.686,-72.912 -74.886,-72.995 -75.137,-73.246 -75.203,-73.405 -75.203,-76.012 -75.503,-76.312 -84.784,-76.312 -85.084,-75.994
no net on F.Cu "F.Cu--1" (solid, remove dead copper, pour order 11): -86.153,-61.062 -85.903,-60.812 -82.003,-60.812 -81.753,-61.062 -81.753,-65.662 -82.003,-65.912 -85.89,-65.912 -86.14,-65.65
no net on F.Cu "F.Cu-" (solid, remove dead copper, pour order 4): -163.203,-43.412 -162.903,-43.112 -62.803,-43.112 -62.503,-43.412 -62.503,-113.612 -62.803,-113.912 -162.902,-113.912 -163.202,-113.61
no net on B.Cu "B.Cu--3" (solid, remove dead copper, pour order 8): -95.256,-77.327 -95.145,-77.099 -94.147,-76.287 -93.936,-76.22 -90.243,-76.491 -89.965,-76.802 -90.241,-83.556 -90.558,-83.844 -95.057,-83.575 -95.339,-83.266
no net on B.Cu "B.Cu--2" (solid, remove dead copper, pour order 6): -84.82,-71.591 -84.523,-71.309 -77.251,-71.243 -77.031,-71.145 -76.663,-70.738 -76.589,-70.582 -76.343,-68.972 -76.04,-68.718 -63.22,-69.005 -62.927,-69.328 -63.182,-72.637 -63.479,-72.914 -74.76,-72.994 -74.963,-73.094 -75.169,-73.36 -75.209,-73.46 -75.474,-76.033 -75.783,-76.302 -84.757,-76.005 -85.045,-75.669
no net on B.Cu "B.Cu--1" (solid, remove dead copper, pour order 10): -85.915,-61.064 -85.651,-60.827 -82,-61.047 -81.766,-61.309 -81.99,-65.659 -82.255,-65.896 -85.881,-65.666 -86.114,-65.391
no net on B.Cu "B.Cu-" (solid, remove dead copper, pour order 5): -162.904,-43.411 -162.603,-43.113 -62.803,-43.411 -62.504,-43.712 -62.802,-113.612 -63.103,-113.911 -162.9,-113.611 -163.199,-113.309

## Keep-outs
F.Cu:
  region: -62.503,-113.912 -87.661,-113.912 -87.761,-87.919 -62.703,-87.812
B.Cu:
  region: -62.503,-113.912 -87.661,-113.912 -87.761,-87.919 -62.703,-87.812

## Silkscreen, mask and mechanical layers (free items; w line width, h text height)
F.SilkS:
  text "3V3" at -120.203,-75.019 h0.7
  text "DIO" at -114.303,-75.019 h0.7
  text "RES" at -120.27,-76.289 h0.7
  text "CLK" at -114.303,-76.289 h0.7
  text "GND" at -120.403,-77.559 h0.7
  text "GND" at -119.656,-85.712 h0.7 r90
  text "3V3" at -117.115,-85.712 h0.7 r90
  text "CLK" at -114.576,-85.712 h0.7 r90
  text "DIO" at -112.036,-85.712 h0.7 r90
  text "RES" at -109.496,-85.712 h0.7 r90
  text "KNX_Control_v0.1" at -159.053,-112.811 h1.5
Edge.Cuts:
  drawing of 32835 lines, arcs and shapes, not listed
Mechanical 3:
  drawing of 106 lines, arcs and shapes, not listed
  text "90,60" at 199.36,138.687 h2.91
  text "68,87" at 199.36,132.687 h2.91
  text "44,90" at 199.36,126.62 h2.91
  text "89" at 173.976,90.568 h2.91 r310.62
  text "36,05" at 255.34,89.105 h2.91 r90
  text "45,50" at 260.925,89.105 h2.91 r90
  text "8" at 214.142,85.664 h2.91
  text "3" at 182.478,85.433 h2.91 r90
  text "2,94" at 234.593,82.144 h2.91 r90
  text "20,60" at 249.984,79.353 h2.91 r90
  text "15,90" at 198.195,72.282 h2.91
  text "74,63" at 198.982,52.894 h2.91
  text "9,82" at 200.058,21.107 h2.91
  text "5,08" at 229.222,18.429 h2.91 r90
  text "4" at 258.584,14.067 h2.91 r30
  text "28x" at 249.441,8.788 h2.91 r30
  text "38,05" at 198.907,-26.456 h2.91
  text "41,05" at 198.907,-37.553 h2.91
  text "137,16" at 140.442,-44.671 h2.91 r90
  text "158" at 258.176,-47.118 h2.91 r90
  text "44,73" at 198.907,-47.774 h2.91
Dwgs.User:
  lines w0.254: -161.953,-99.222 -61.953,-99.222 -61.953,-52.122 -161.953,-52.122 -161.953,-99.222 ; -160.693,-123.762 -62.843,-123.762 -62.843,-24.787 -160.693,-24.787 -160.693,-123.762
User.3:
  drawing of 289 lines, arcs and shapes, not listed
User.2:
  drawing of 520 lines, arcs and shapes, not listed

## Text inside footprints (layer, text, board x,y; h text height)
J3: Cmts.User "KEEPOUT" at -116.124,-76.002 h0.4 r90
REF**: F.Cu "T" at -157.324,-109.069 h1; B.Cu "B" at -153.271,-109.069 h1
U1: F.Fab "*" at -102.846,-71.583 h1 r90; F.Fab "*" at -102.846,-71.583 h1 r90; F.SilkS "*" at -102.846,-73.031 h1 r90; F.SilkS "*" at -102.846,-73.031 h1 r90